# Altium PCB pcb.PcbDoc
Units mm, origin at the board's own origin, x right, y up, seen from the top; angles counter-clockwise.
Board outline 50.2 x 68.2 mm, 2 copper layers (Top Layer, Bottom Layer); 32 components, 24 nets, 104 pads, 4 vias.
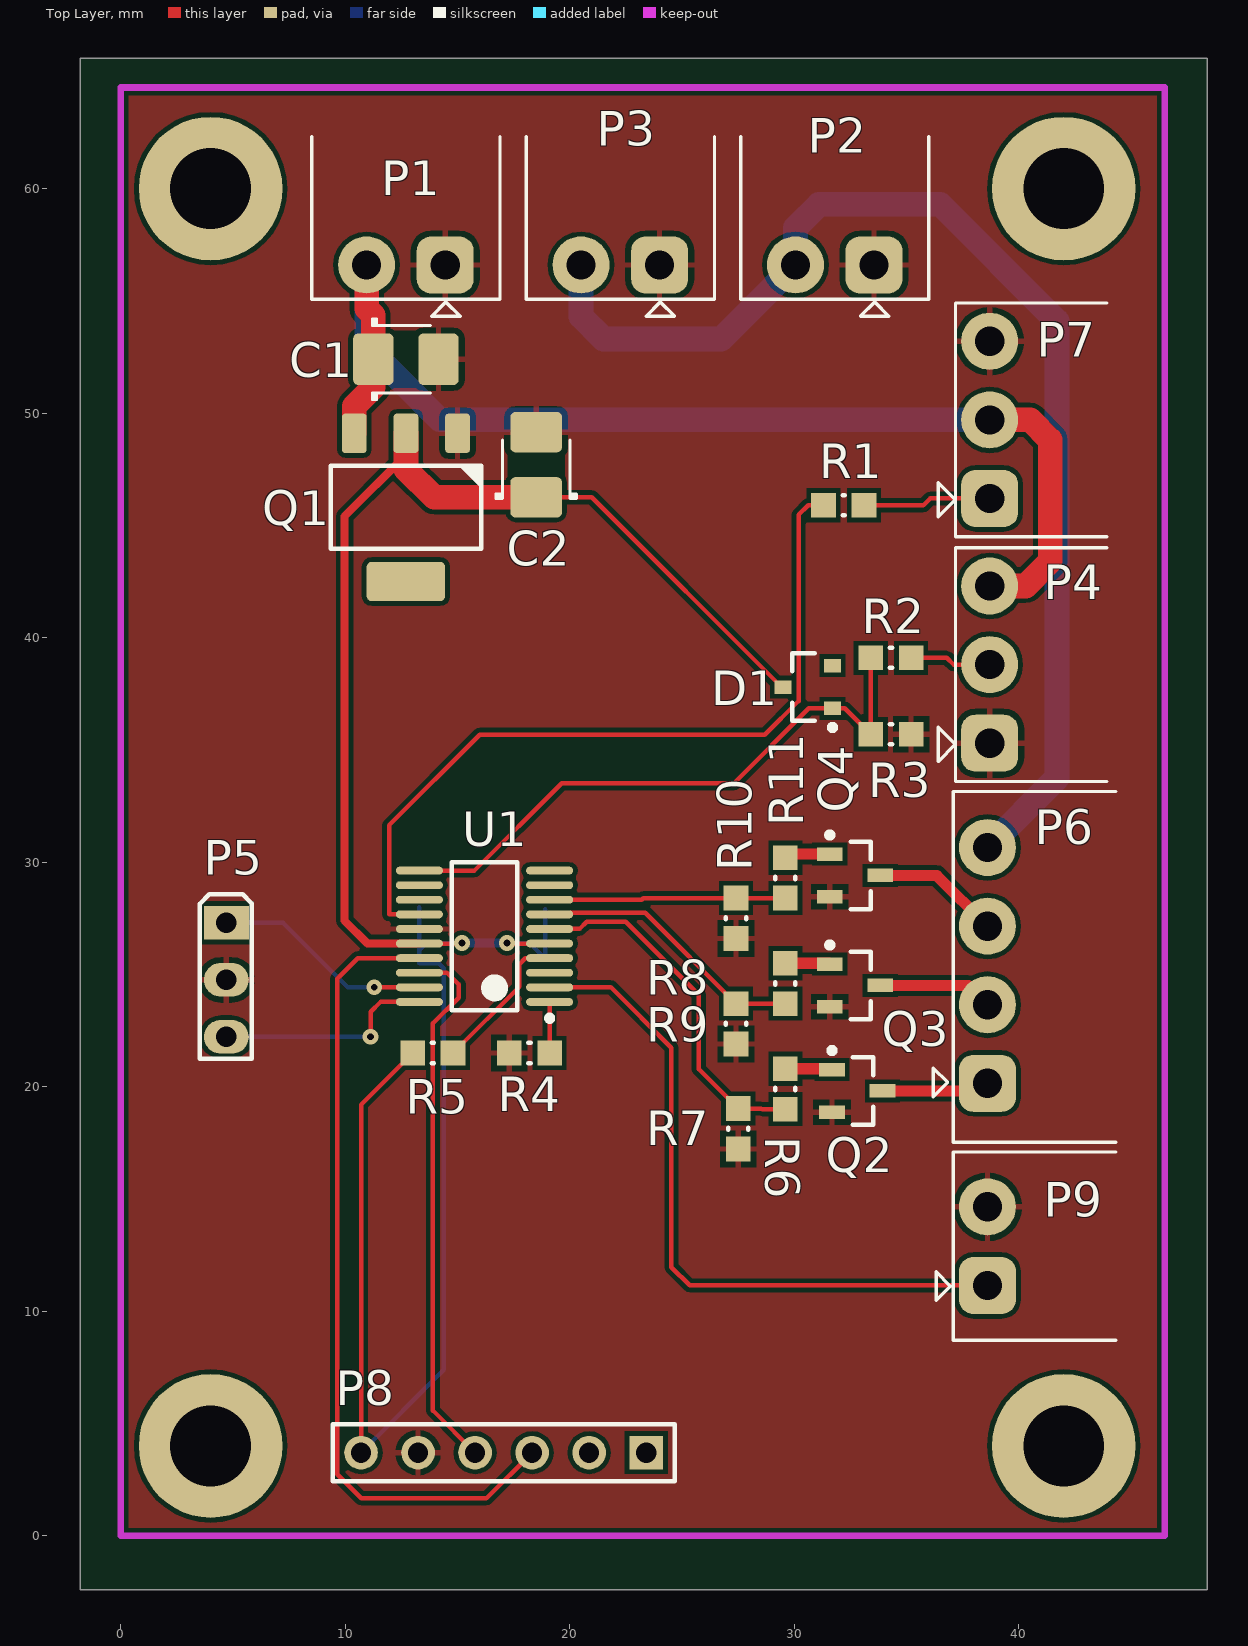
[diagram p0: Top Layer view]
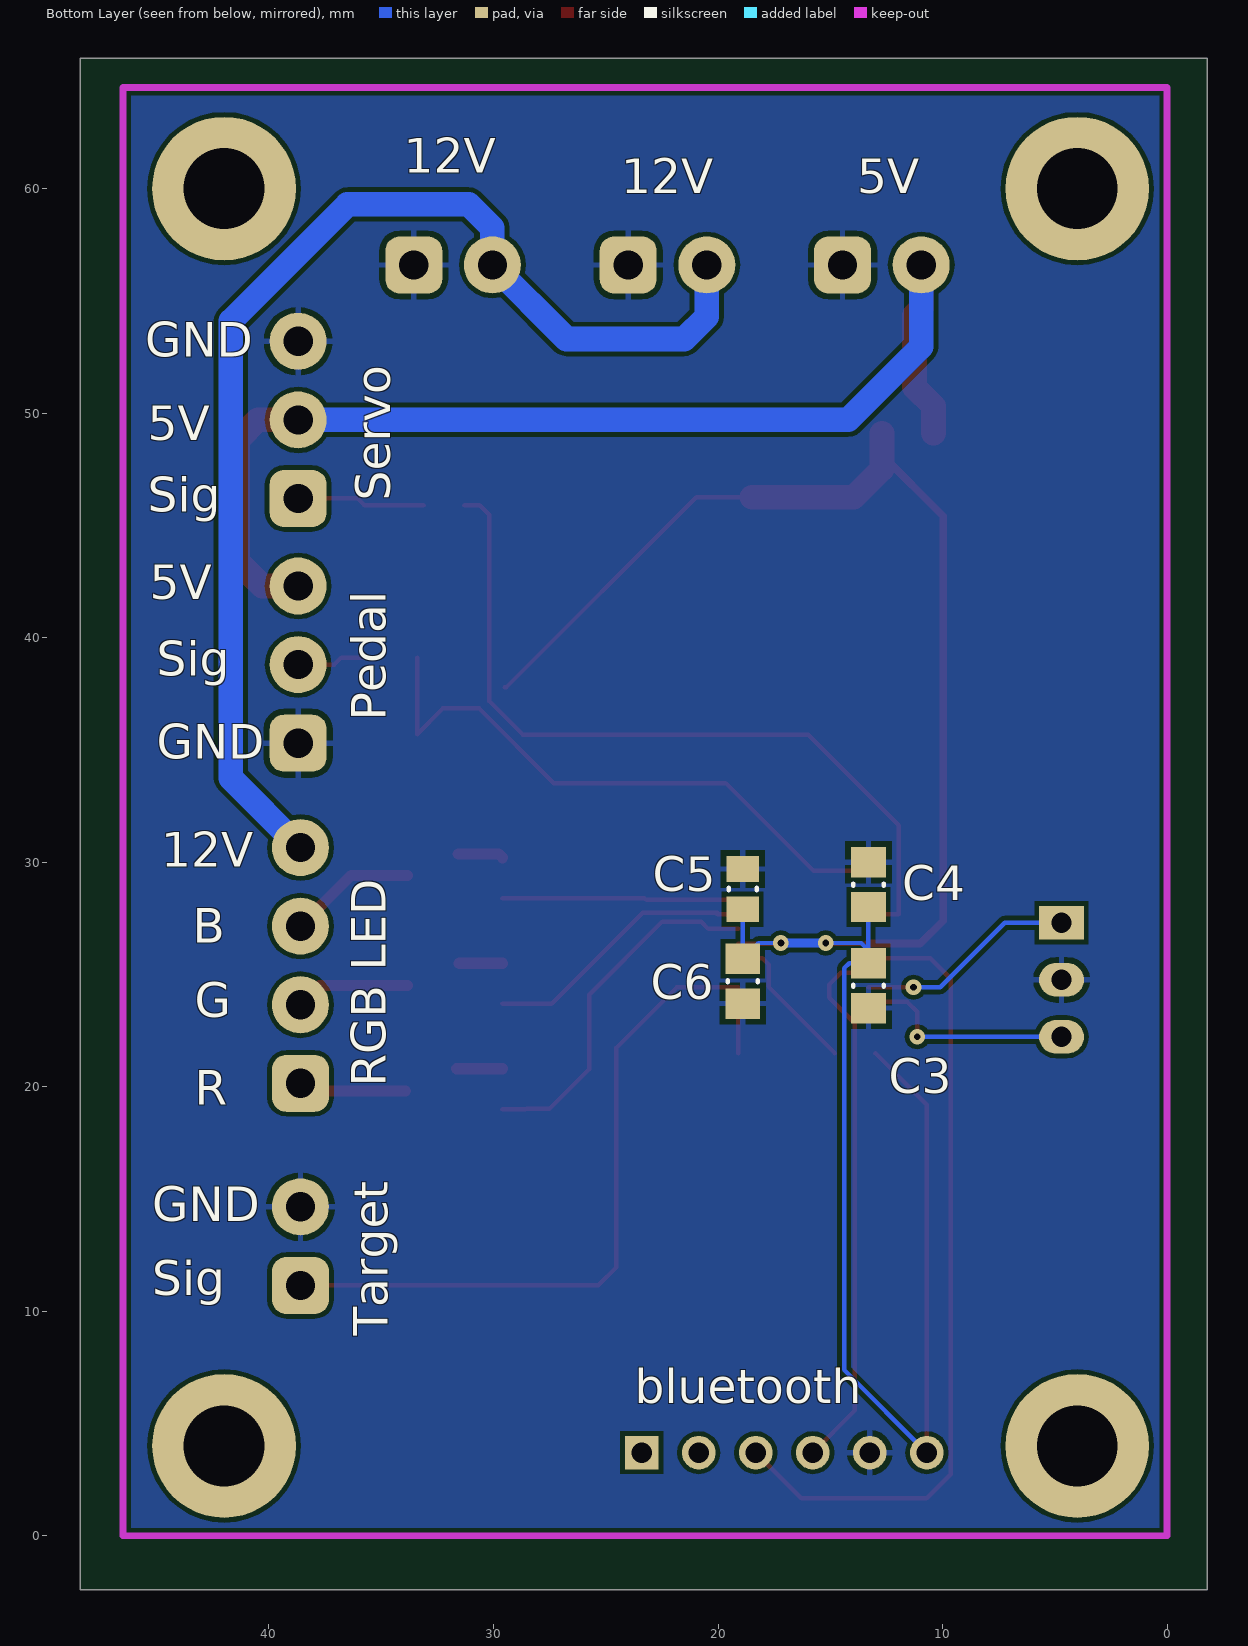
[diagram p1: Bottom Layer view, seen from below]

## Layer stack, top to bottom
Top Solder: solder mask 0.0102, Solder Resist, Dk 3.5
Top Layer: signal copper 0.0356
Dielectric 1: dielectric 0.32, FR-4, Dk 4.8
Bottom Layer: signal copper 0.0356
Bottom Solder: solder mask 0.0102, Solder Resist, Dk 3.5

## Board outline
-1.8,-2.4 48.4,-2.4 48.4,65.8 -1.8,65.8

## Design rules (kind name [scope] priority, off if disabled: settings)
Clearance [All] p1: gap=0.2
HoleSize [All] p1: absolutevalues=TRUE maxlimit=4 minlimit=0.2 maxpercent=80.000 minpercent=20.000
PolygonConnect [All] p1: connectstyle=Relief reliefconductorwidth=0.254 reliefentries=4 polygonreliefangle="90 Angle" airgapwidth=0.254
RoutingVias [All] p1: holewidth=0.3 width=0.7 viastyle="Through Hole" minholewidth=0.711 minwidth=1.27 maxholewidth=0.711 maxwidth=1.27
SilkToSolderMaskClearance [IsPad] p1: minsilkscreentomaskgap=0.075 clearancetoexposedcopper=TRUE
SolderMaskExpansion [All] p1: expansion=0.102
UnpouredPolygon [All] p1: allowunpoured=FALSE
Width [All] p1: maxlimit=2 minlimit=0.2 preferedwidth=0.2 minimp=50.000000 maximp=50.000000 favimp=50.000000
27 further rules are at their usual default settings.

## Components (designator, comment, footprint, x,y, rotation, side; value= is the part's Value field where it differs from the comment)
C1 "10uF" CAPMP3528X210N 12.7,52.4 r0 top
C2 "22uF" CAPMP3528X210N 18.5,47.7 r90 top
C3 "4.7uF" CAPC0805(2012)145_M 13.3,24.5 r90 bottom
C4 "100nF" CAPC0805(2012)100_M 13.3,29 r270 bottom
C5 "10nF" CAPC0805(2012)100_N 18.9,28.8 r270 bottom
C6 "1uF" CAPC0805(2012)145_M 18.9,24.7 r90 bottom
D1 "BAS16" INF-SOT23_L 30.6,37.8 r180 top
P1 "5V Power" 15EDGRC-3.5-02P 12.7,56.6 r270 top
P2 "12V Power" 15EDGRC-3.5-02P 31.8,56.6 r270 top
P3 "12V Power" 15EDGRC-3.5-02P 22.25,56.6 r270 top
P4 "Pedal" 15EDGRC-3.5-03P 38.7,38.8 r180 top
P5 "SWD" "Line 2.54 X 3" 4.7,27.3 r0 top
P6 "RGB" 15EDGRC-3.5-04P 38.6,25.4 r180 top
P7 "Servo" 15EDGRC-3.5-03P 38.7,49.7 r180 top
P8 "bt" HDR1X6 23.4,3.7 r180 top
P9 "Button" 15EDGRC-3.5-02P 38.6,12.9 r180 top
Q1 "AMS1117" SOT223 12.7,45.8 r270 top
Q2 "IRLML2502" SOT-23_N 32.8,19.8 r0 top
Q3 "IRLML2502" SOT-23_N 32.7,24.5 r0 top
Q4 "IRLML2502" SOT-23_N 32.7,29.4 r0 top
R1 "100" RESC0603(1608)_M 32.2,45.9 r0 top
R2 "3K" RESC0603(1608)_M 34.3,39.1 r0 top
R3 "10K" RESC0603(1608)_M 34.3,35.7 r180 top
R4 "3K" RESC0603(1608)_M 18.2,21.5 r180 top
R5 "10K" RESC0603(1608)_M 13.9,21.5 r180 top
R6 "3K" RESC0603(1608)_M 29.6,19.9 r270 top
R7 "10K" RESC0603(1608)_M 27.5,18.126 r90 top
R8 "3K" RESC0603(1608)_M 29.6,24.6 r270 top
R9 "10K" RESC0603(1608)_M 27.4,22.8 r90 top
R10 "10K" RESC0603(1608)_M 27.4,27.5 r90 top
R11 "3K" RESC0603(1608)_M 29.6,29.3 r270 top
U1 "STM32F050F4P6" STM-TSSOP20_M 16.2,26.7 r180 top

## Footprints (in the part's own frame and the unit in brackets; to place one, negate y for a bottom-side part, rotate by r counter-clockwise, add the part's x,y. Pads: shape width x height; smd on the part's side, far side on the other; paste and mask are expansions set on the pad)
15EDGRC-3.5-02P [mm]
  rrect50% 2.54x2.54 hole 1.3: 1(0,1.75)
  round 2.54 hole 1.3: 2(0,-1.75)
  silkscreen extent -5.71,-4.19 2.29,4.19
15EDGRC-3.5-03P [mm]
  rrect50% 2.54x2.54 hole 1.3: 1(0,3.5)
  round 2.54 hole 1.3: 2(0,0) 3(0,-3.5)
  silkscreen extent -5.21,-5.21 2.29,5.21
15EDGRC-3.5-04P [mm]
  rrect50% 2.54x2.54 hole 1.3: 1(0,5.25)
  round 2.54 hole 1.3: 2(0,1.75) 3(0,-1.75) 4(0,-5.25)
  silkscreen extent -5.71,-7.75 2.41,7.87
CAPC0805(2012)100_M [mm] "Chip Capacitor, Body 2.0x1.2mm, Height 1.0mm, IPC Low Density"
  rect 1.35x1.55 smd: 1(-1,0) 2(1,0)
  silkscreen extent -0.05,-0.67 0.05,0.67, body extent -1.1,-0.72 1.1,0.72, height 1
CAPC0805(2012)100_N [mm] "Chip Capacitor, Body 2.0x1.2mm, Height 1.0mm, IPC Medium Density"
  rect 1.15x1.45 smd: 1(-0.9,0) 2(0.9,0)
  silkscreen extent -0.05,-0.63 0.05,0.62, body extent -1.1,-0.72 1.1,0.73, height 1
CAPC0805(2012)145_M [mm] "Chip Capacitor, Body 2.0x1.2mm, Height 1.45mm, IPC Low Density"
  rect 1.35x1.55 smd: 1(-1,0) 2(1,0)
  silkscreen extent -0.05,-0.67 0.05,0.67, body extent -1.1,-0.72 1.1,0.72, height 1.45
CAPMP3528X210N [mm] "Molded body capacitor, Body 3.5x2.8mm, 1210, IPC Nominal settings"
  round 0.254 on Mech15: 0(0,0)
  rrect25% 1.8x2.3 smd: 1(-1.45,0) 2(1.45,0)
  Top Layer pour cut-out: -0.508,1.27 0.508,1.27 0.508,-1.27 -0.508,-1.27
  silkscreen extent -1.5,-1.8 1.1,1.8, body extent -1.75,-1.4 1.75,1.4, height 2.1
HDR1X6 [mm] "Connector; Header; 6 Position"
  rect 1.5x1.5 hole 0.9: 1(0,0)
  round 1.5 hole 0.9: 2(2.54,0) 3(5.08,0) 4(7.62,0) 5(10.16,0) 6(12.7,0)
  silkscreen extent -1.27,-1.27 13.97,1.27
INF-SOT23_L [mm] "SOT23, 3-Leads, Body 2.9x1.3 mm, Pitch 0.95 mm, IPC High Density"
  rect 0.75x0.6 smd: 1(-1.1,0.95) 2(-1.1,-0.95) 3(1.1,0)
  silkscreen extent -1.23,-1.5 0.7,1.92, body extent -0.7,-1.5 0.7,1.5, height 1.1
"Line 2.54 X 3" [mm]
  rect 2x1.5 hole 0.9: 1(0,0)
  oval 2x1.5 hole 0.9: 2(0,-2.54) 3(0,-5.08)
  silkscreen extent -1.18,-6.05 1.12,1.27, body extent -1.27,-6.24 1.22,1.38, height 8.2
RESC0603(1608)_M [mm] "Chip Resistor, Body 1.6x0.8mm, IPC Low Density"
  rect 1.1x1.1 smd: 1(-0.9,0) 2(0.9,0)
  silkscreen extent -0.05,-0.45 0.05,0.45, body extent -0.85,-0.47 0.85,0.47, height 0.6
SOT223 [mm] "SOT223 /SC-73"
  round 1 on Mech15: 0(0,0)
  rrect25% 1.75x1.1 smd: 1(-3.3,2.3) 2(-3.3,0) 3(-3.3,-2.3)
  rrect25% 1.75x3.5 smd: 4(3.3,0)
  silkscreen extent -1.85,-3.35 1.85,3.35, body extent -3.65,-3.35 3.65,3.35, height 1.8
SOT-23_N [mm]
  rect 1.15x0.6 smd: 1(-1.121,0.96) 2(-1.121,-0.94) 3(1.129,0.01)
  silkscreen extent -1.25,-1.49 0.7,1.93, body extent -0.7,-1.49 0.7,1.51, height 1.1
STM-TSSOP20_M [mm] "SOP, 20-Leads, Body 6.6x4.5mm, Pitch 0.65mm, IPC Low Density"
  oval 2.1x0.35 smd: 1(-2.9,2.925) 2(-2.9,2.275) 3(-2.9,1.625) 4(-2.9,0.975) 5(-2.9,0.325) 6(-2.9,-0.325) 7(-2.9,-0.975) 8(-2.9,-1.625) 9(-2.9,-2.275) 10(-2.9,-2.925) 11(2.9,-2.925) 12(2.9,-2.275) 13(2.9,-1.625) 14(2.9,-0.975) 15(2.9,-0.325) 16(2.9,0.325) 17(2.9,0.975) 18(2.9,1.625) 19(2.9,2.275) 20(2.9,2.925)
  silkscreen extent -3.03,-3.3 1.45,3.77, body extent -2.25,-3.3 2.25,3.3, height 1.2

## Part data
C1 C2: library part CMP-0279-00001-1, "Capacitor, Tantalum, 10uF 10% 20V MCCT-B (3528)"
C3: library part CMP-1036-04901-1, "CAP 4.7uF 50V ±20% 0805 (2012 Metric) Thickness 1.45mm SMD"
C4: library part CMP-1036-04420-1, "CAP 100nF 50V ±10% 0805 (2012 Metric) Thickness 1mm SMD"
C5: library part CMP-1036-03844-1, "CAP 10nF 50V ±10% 0805 (2012 Metric) Thickness 1mm SMD"
C6: library part CMP-1036-04763-1, "CAP 1uF 50V ±20% 0805 (2012 Metric) Thickness 1.45mm SMD"
D1: library part CMP-1176-00017-1, "Silicon Switching Diode, SOT23, Reel, Green"
P1 P2 P3 P9: library part "Header 2", "Header, 2-Pin"
P4 P7: library part "Header 3", "Header, 3-Pin"
P5: library part PLS-3, "Vert, Sgl line, Male"
P6: library part "Header 2X2", "Header, 2-Pin, Dual row"
P8: library part "Header 6", "Header, 6-Pin"
Q1: "AMS1117, 1A Low dropout voltage regulator"
R1 R2 R3 R4 R5 R6 R7 R8 R9 R10 R11: library part CMP-1012-00085-1, "3K 0.1W 5% 0603 (1608 Metric)  SMD"
U1: library part CMP-0304-00038-2, "ARM Cortex-M0 32-bit MCU, 16 KB Flash, 4 KB Internal RAM, 15 I/Os, 20-pin TSSOP, -40 to 85 degC, Tube"

## Free pads (board coordinates)
  round 6.4 hole 3.6 unplated: 0(4,4) 0(4,60) 0(42,60)
  round 6.4 hole 3.6 unplated mask+0.102: 0(42,4)

## Via types
v1: diameter 0.7, hole 0.3, Top Layer to Bottom Layer, 4 vias

## Nets (pads, with @x,y where several pads share a name; then routed paths per layer and width w, separated by ;. In a path a pad name is that pad's centre, name@x,y a point inside that pad or via, vN(x,y) a via of type N, cw(c..) or ccw(c..) an arc to the next point about the centre after c; other vN are vias at no path point)
5V: C1.1 P1.2 P4.3 P7.2 Q1.3 | length 52.4
  Top Layer w1.1: Q1.3 10.4,50.308 11.25,51.158 C1.1 11.25,54.346 10.95,54.646 P1.2 ; P4.3 40.3,42.3 41.4,43.4 41.4,48.8 40.5,49.7 P7.2
  Bottom Layer w1.1: P1.2 10.95,52.95 14.2,49.7 P7.2
12V: P2.2 P3.2 P6.4 | length 54.3
  Bottom Layer w1.1: P3.2 20.5,54.3 21.5,53.3 26.75,53.3 P2.2 30.05,58.25 31.1,59.3 36.5,59.3 41.7,54.1 41.7,33.75 P6.4
BLUELOGIC: R10.2 R11.2 U1.8 | length 10.5
  Top Layer w0.2: U1.8 23.202,28.325 23.277,28.4 R10.2 28.485,28.4 R11.2
BLUEPOWER: P6.3 Q4.3 | length 5.7
  Top Layer w0.5: Q4.3 36.34,29.41 P6.3
BUTTON: P9.1 U1.2 | length 30.7
  Top Layer w0.2: U1.2 21.83,24.425 24.522,21.733 24.522,11.963 25.335,11.15 P9.1
GND: C1.2 C2.2 C3.1 C4.1 C5.1 C6.1 P1.1 P2.1 P3.1 P4.1 P5.2 P7.3 P8.5 P9.2 Q1.1 Q2.2 Q3.2 Q4.2 R3.1 R4.2 R7.1 R9.1 R10.1 U1.15
GREENLOGIC: R8.2 R9.2 U1.7 | length 12.2
  Top Layer w0.2: U1.7 20.036,27.675 20.036,27.743 23.357,27.743 R9.2 28.485,23.7 R8.2
GREENPOWER: P6.2 Q3.3 | length 5.1
  Top Layer w0.5: Q3.3 37.74,24.51 P6.2
NetP4_2: P4.2 R2.2 | length 3.6
  Top Layer w0.2: R2.2 36.791,39.1 37.091,38.8 P4.2
NetQ2_1: Q2.1 R6.1 | length 2.1
  Top Layer w0.2: Q2.1@31.639,20.8 Q2.1
  Top Layer w0.5: R6.1 Q2.1@31.639,20.8
NetQ3_1: Q3.1 R8.1 | length 1.9
  Top Layer w0.5: R8.1 Q3.1@31.539,25.5
NetQ4_1: Q4.1 R11.1 | length 2
  Top Layer w0.5: R11.1 29.76,30.36 Q4.1
NetR1_1: R1.1 U1.14 | length 35.4
  Top Layer w0.2: U1.14 11.949,27.675 11.949,31.639 15.988,35.677 28.688,35.677 30.187,37.176 30.187,45.468 30.618,45.9 R1.1
NetR4_1: R4.1 U1.1 | length 2.3
  Top Layer w0.2: R4.1 U1.1
NetR5_1: R5.1 U1.4 | length 6.6
  Top Layer w0.2: R5.1 17.741,24.441 17.741,25.446 18.02,25.725 U1.4
PEDAL: D1.1 R2.1 R3.2 U1.11 | length 27
  Top Layer w0.2: U1.11 15.752,29.625 19.646,33.518 27.312,33.518 30.644,36.85 D1.1 32.25,36.85 R3.2 33.4,37.379 R2.1
REDLOGIC: R6.2 R7.2 U1.6 | length 16
  Top Layer w0.2: U1.6 20.433,27.025 20.751,27.343 22.494,27.343 25.742,24.095 25.742,20.784 R7.2 28.536,19.026 28.561,19 R6.2
REDPOWER: P6.1 Q2.3 | length 4.8
  Top Layer w0.2: P6.1@38.26,19.81 P6.1
  Top Layer w0.5: Q2.3 P6.1@38.26,19.81
RX: P8.4 U1.18 | length 24.1
  Top Layer w0.2: U1.18 14.525,25.075 15.048,24.552 15.048,23.968 13.905,22.825 13.905,5.575 P8.4
SERVO: P7.1 R1.2 | length 5.7
  Top Layer w0.2: R1.2 35.749,45.9 36.049,46.2 P7.1
SWCLK: P5.3 U1.20 | length 9.9
  Top Layer w0.2: v1(11.126,22.22) 11.126,23.333 11.568,23.775 U1.20
  Bottom Layer w0.2: P5.3 v1(11.126,22.22)
SWDIO: P5.1 U1.19 | length 9.8
  Top Layer w0.2: v1(11.289,24.425) U1.19
  Bottom Layer w0.2: P5.1 7.225,27.3 10.1,24.425 v1(11.289,24.425)
TX: P8.3 U1.17 | length 36.1
  Top Layer w0.2: U1.17 10.552,25.725 9.638,24.811 9.638,2.733 10.705,1.667 16.287,1.667 P8.3
VCC: C2.1 C3.2 C4.2 C5.2 C6.2 D1.3 P8.6 Q1.2 R5.2 U1.5 U1.16 | length 105.6
  Top Layer w0.2: P8.6 10.7,19.2 R5.2 ; U1.16 15.175,26.375 v1(15.2,26.4) ; v1(17.2,26.4) 17.225,26.375 U1.5 ; C2.1 20.975,46.25 29.425,37.8 D1.3
  Top Layer w0.35: 12.7,48.135 9.968,45.403 9.968,27.397 10.99,26.375 U1.16
  Top Layer w1.1: Q1.2 12.7,48.135 12.7,47.506 13.956,46.25 C2.1
  Bottom Layer w0.2: P8.6 14.388,7.388 14.388,25.271 14.159,25.5 C3.2 C3.2@13.3,26.076 ; C4.2 C3.2@13.3,26.076 ; v1(15.2,26.4) 13.624,26.4 C3.2@13.3,26.076 ; v1(17.2,26.4) 18.2,26.4 C6.2 C5.2
  Bottom Layer w0.4: v1(15.2,26.4) v1(17.2,26.4)
pads on no net: C1.0 C2.0 D1.2 P8.1 P8.2 Q1.0 Q1.4 U1.3 U1.9 U1.10 U1.12 U1.13

## Polygon pours and split planes (outlines as drawn)
GND on Top Layer "GND-TOP" (solid, remove dead copper, pour order 10): 0,64.5 46.5,64.5 46.5,0 0,0
GND on Bottom Layer "GND-TOP" (solid, remove dead copper, pour order 12): 0,64.5 46.5,64.5 46.5,0 0,0

## Keep-outs
Keep-Out Layer:
  lines w0.3: 0,0 0,64.5 46.5,64.5 46.5,0 0,0

## Silkscreen, mask and mechanical layers (free items; w line width, h text height)
Bottom Overlay:
  text "12V" at 34,60.7 h1.52
  text "5V" at 13.8,59.8 h1.52
  text "12V" at 24.3,59.8 h1.52
  text "GND" at 45.5,52.5 h1.52
  text "5V" at 45.4,48.8 h1.52
  text "Servo" at 34.6,46.1 h1.52 r270
  text "Sig" at 45.4,45.6 h1.52
  text "5V" at 45.3,41.7 h1.52
  text "Sig" at 45,38.3 h1.52
  text "Pedal" at 34.8,36.3 h1.52 r270
  text "GND" at 45,34.6 h1.52
  text "12V" at 44.8,29.8 h1.52
  text "B" at 43.4,26.4 h1.52
  text "G" at 43.3,23.1 h1.52
  text "RGB LED" at 34.8,20 h1.52 r270
  text "R" at 43.3,19.2 h1.52
  text "GND" at 45.2,14 h1.52
  text "Sig" at 45.2,10.7 h1.52
  text "Target" at 34.7,8.9 h1.52 r270
  text "bluetooth" at 23.7,5.9 h1.52